# EAGLE board M896n (EAGLE 4.11)
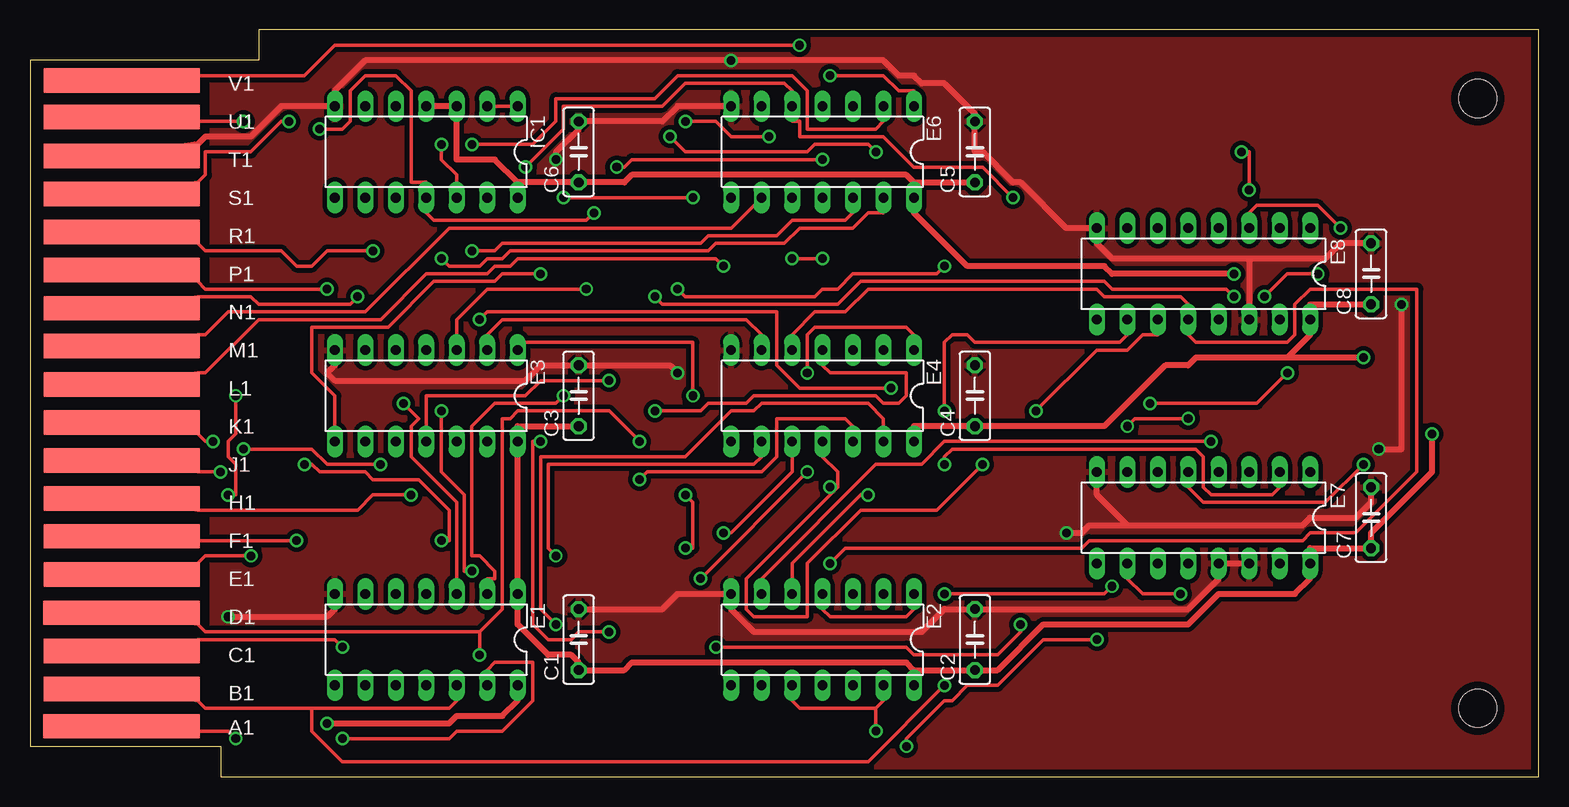
[diagram p0: board, top side]
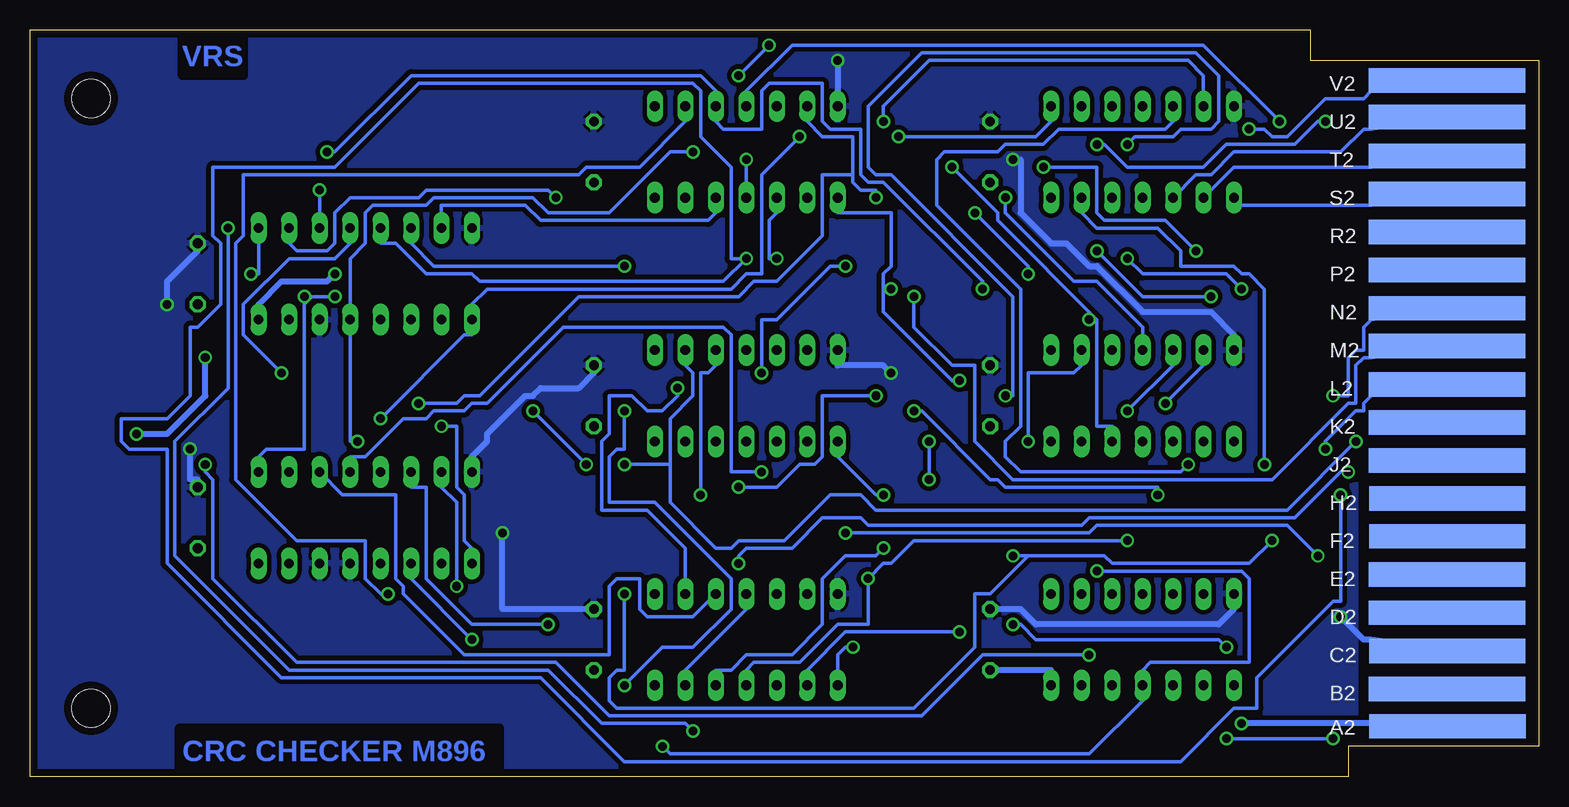
[diagram p1: board, bottom side, seen from below]

Size 125.73 x 62.23 mm. Coordinates in mm from the lower left corner, seen from the top.
Copper layers (1*16): Top 0.035mm / dielectric 1.5mm / Bottom 0.035mm
Design rules "10mils": minimum track width 12mil, minimum drill 28mil, track to track 10mil, track to pad 10mil, pad to pad 10mil, via to via 10mil, smd to smd 10mil, copper to edge 25mil, drill to drill 10mil, minimum pad ring 10mil, minimum via ring 8mil, stop-mask expansion 0mil, vias tented up to drill 0mil, thermal gap 10mil
Net classes: 1 power: width 0.508 mm
bRestrict: area 108,58.4 to 113,62.2; area 86.6,0.3 to 113.3,4.1

## Footprints (pad centres in the part's own frame; a part is rotated, then mirrored left to right if it is on the bottom)
C050-025X075 = drill 0.813 octagon: 1 -2.54,0; 2 2.54,0
DIL14 = drill 0.813 long: 1 -7.62,-3.81; 2 -5.08,-3.81; 3 -2.54,-3.81; 4 0,-3.81; 5 2.54,-3.81; 6 5.08,-3.81; 7 7.62,-3.81; 8 7.62,3.81; 9 5.08,3.81; 10 2.54,3.81; 11 0,3.81; 12 -2.54,3.81; 13 -5.08,3.81; 14 -7.62,3.81
DIL16 = drill 0.813 long: 1 -8.89,-3.81; 2 -6.35,-3.81; 3 -3.81,-3.81; 4 -1.27,-3.81; 5 1.27,-3.81; 6 3.81,-3.81; 7 6.35,-3.81; 8 8.89,-3.81; 9 8.89,3.81; 10 6.35,3.81; 11 3.81,3.81; 12 1.27,3.81; 13 -1.27,3.81; 14 -3.81,3.81; 15 -6.35,3.81; 16 -8.89,3.81
EDGE-CON2 = smd 13.017 x 2.032: A1 7.633,4.207; B1 7.639,7.327; C1 7.636,10.489; D1 7.633,13.665; E1 7.642,16.84; F1 7.642,20.041; H1 7.642,23.19; J1 7.642,26.34; K1 7.642,29.515; L1 7.642,32.69; M1 7.642,35.89; N1 7.642,39.04; P1 7.642,42.24; R1 7.642,45.39; S1 7.642,48.565; T1 7.642,51.74; U1 7.642,54.966; V1 7.642,58.026 | smd 13.017 x 2.032 bottom: A2 7.614,4.207; B2 7.642,7.328; C2 7.617,10.49; D2 7.642,13.665; E2 7.642,16.84; F2 7.617,20.041; H2 7.617,23.19; J2 7.642,26.34; K2 7.642,29.515; L2 7.642,32.69; M2 7.642,35.89; N2 7.642,39.04; P2 7.642,42.24; R2 7.642,45.39; S2 7.642,48.565; T2 7.642,51.74; U2 7.642,54.966; V2 7.642,58.026
SINGLE = hole 3.175: 120.65,56.515; 120.65,5.715

## Placement (x,y rotation side)
C1  .01uf  [C050-025X075]  45.72,11.43 90 top
C2  .01uf  [C050-025X075]  78.74,11.43 90 top
C3  .01uf  [C050-025X075]  45.72,31.75 90 top
C4  .01uf  [C050-025X075]  78.74,31.75 90 top
C5  .01uf  [C050-025X075]  78.74,52.07 90 top
C6  .01uf  [C050-025X075]  45.72,52.07 90 top
C7  .01uf  [C050-025X075]  111.76,21.59 90 top
C8  .01uf  [C050-025X075]  111.76,41.91 90 top
E1  7486N  [DIL14]  33.02,11.43 180 top
E2  7486N  [DIL14]  66.04,11.43 180 top
E3  7430N  [DIL14]  33.02,31.75 180 top
E4  7486N  [DIL14]  66.04,31.75 180 top
E6  7486N  [DIL14]  66.04,52.07 180 top
E7  74174N  [DIL16]  97.79,21.59 180 top
E8  74174N  [DIL16]  97.79,41.91 180 top
IC1  7410N  [DIL14]  33.02,52.07 180 top
U$1  [EDGE-CON2]  0,0 0 top
U$4  OUTLINE-SINGLE  [SINGLE]  0,0 0 top

## Library data of the parts
C1-C8 = rcl
E1-E4 E6-E8 IC1 = 74xx-jameco
U$1 U$4 = dec-con

## Nets
A1: E1.13 U$1.A1
B1: E1.12 E8.10 U$1.B1
C1: E4.13 U$1.C1
D1: E4.12 E7.5 U$1.D1
E1: E4.10 U$1.E1
F1: E4.9 E7.7 U$1.F1
GND [power]: C1.2 C2.2 C3.2 C4.2 C5.2 C6.2 C7.2 C8.2 E1.7 E2.7 E3.7 E4.7 E6.7 E7.8 E7.13 E7.14 E8.8 E8.14 IC1.7 U$1.C2 U$1.T1
H1: E4.4 U$1.H1
J1: E4.5 E8.12 U$1.J1
K1: E4.2 E7.2 U$1.K1
L1: E4.1 U$1.L1
L2: IC1.5 U$1.L2
M1: E6.9 U$1.M1
M2: E7.1 E8.1 U$1.M2
N1: E6.12 E8.7 U$1.N1
N2: E6.10 E8.5 U$1.N2
N$1: E2.1 E2.4 E2.10 E2.13 E3.3 E6.3 E8.3
N$2: E2.2 E3.12 E6.11
N$3: E2.5 E4.3
N$4: E2.9 E3.2 E4.6
N$5: E2.12 E4.8
N$6: E1.11 E3.5 E7.11
N$7: E3.1 E4.11 E8.11
N$8: E1.2 IC1.12
N$9: E3.11 E6.8 E8.6
N$10: E3.4 E6.6 E8.4
N$11: E1.3 E3.6
N$12: E2.6 E8.13 IC1.1 IC1.2
N$13: E2.11 E7.4 IC1.13
N$14: E2.3 E7.3
N$15: E2.8 E7.6
N$16: E7.9 E8.9 IC1.6
P1: E6.13 U$1.P1
R1: E6.5 E8.2 U$1.R1
S1: E6.4 U$1.S1
S2: IC1.8 U$1.S2
T2: IC1.9 U$1.T2
U1: E6.2 E7.10 U$1.U1
U2: IC1.10 U$1.U2
V1: E6.1 U$1.V1
V2: E3.8 IC1.11 U$1.V2
VCC [power]: C1.1 C2.1 C3.1 C4.1 C5.1 C6.1 C7.1 C8.1 E1.1 E1.14 E2.14 E3.14 E4.14 E6.14 E7.16 E8.16 IC1.3 IC1.4 IC1.14 U$1.A2

## Tracks (layer width: path | path; a pad name or v marks a point on that pad's centre or on a via)
A1  (via drill 0.71)
  Top 0.305: v17.15,3.17 16.51,3.81 13.97,3.81 U$1.A1 | v26.04,3.17 34.93,3.17 35.56,3.81 39.37,3.81 41.91,6.35 41.91,9.53 38.74,9.53 38.1,8.89 E1.13
  Bottom 0.305: v17.15,3.17 v26.04,3.17
B1  (via drill 0.71)
  Top 0.305: 23.5,5.71 34.93,5.71 35.56,6.35 E1.12 | 23.5,5.71 14.61,5.71 13.97,6.35 U$1.B1 | v76.2,30.48 76.2,36.2 76.84,36.83 78.11,36.83 78.74,36.2 90.81,36.2 91.44,36.83 E8.10 | v76.2,7.62 69.85,1.27 26.04,1.27 23.5,3.81 23.5,5.71
  Bottom 0.305: v76.2,30.48 76.2,27.3 76.84,27.3 77.47,26.67 77.47,22.86 73.66,22.86 67.31,16.51 67.31,13.97 70.49,10.79 73.03,10.79 v76.2,7.62
C1  (via drill 0.71)
  Top 0.305: v26.04,10.79 25.4,11.43 13.97,11.43 U$1.C1 | v43.82,12.7 42.55,13.97 42.55,26.67 54.61,26.67 58.42,30.48 60.33,30.48 60.96,31.11 69.85,31.11 71.12,29.84 E4.13
  Bottom 0.305: v26.04,10.79 26.67,11.43 41.91,11.43 43.18,12.7 v43.82,12.7
D1  (via drill 0.71)
  Top 0.305: 37.47,12.06 14.61,12.06 13.97,12.7 U$1.D1 | 37.47,12.06 39.37,13.97 39.37,29.84 40.01,29.84 40.64,30.48 48.26,30.48 v50.8,27.94 | v50.8,24.77 51.44,25.4 60.96,25.4 62.23,26.67 62.23,29.84 67.95,29.84 68.58,29.21 E4.12 | v111.13,26.04 107.95,22.86 97.79,22.86 96.52,24.13 E7.5 | 37.47,12.06 v37.47,10.16
  Bottom 0.305: v50.8,27.94 v50.8,24.77 | v111.13,26.04 111.13,25.4 110.49,24.77 110.49,16.51 103.51,9.53 81.92,9.53 77.47,5.08 51.44,5.08 46.36,10.16 v37.47,10.16
E1  (via drill 0.71)
  Top 0.305: v18.42,18.41 14.61,18.41 13.97,17.78 U$1.E1 | v57.79,20.32 58.42,20.32 63.5,25.4 E4.10
  Bottom 0.305: v18.42,18.41 20.96,20.95 36.83,20.95 37.47,20.32 v57.79,20.32
F1  (via drill 0.71)
  Top 0.305: v22.23,19.68 13.97,19.68 U$1.F1 | v43.82,18.41 43.18,19.05 43.18,26.04 60.33,26.04 60.96,26.67 E4.9 | v90.17,15.88 89.54,15.24 v76.2,15.24
  Bottom 0.305: v22.23,19.68 24.13,17.78 35.56,17.78 36.2,18.41 42.55,18.41 | 42.55,18.41 v43.82,18.41 | v90.17,15.88 90.17,22.86 91.44,24.13 E7.7 | v76.2,15.24 76.2,8.89 76.84,8.89 77.47,8.26 77.47,6.35 76.84,5.71 52.07,5.71 46.99,10.79 46.99,15.24 45.72,15.24 42.55,18.41
GND  (via drill 0.71)
  Top 0.508: 101.6,43.18 107.95,43.18 109.22,44.45 C8.2 | 101.6,43.18 90.17,43.18 88.9,44.45 E8.8 86.36,45.72 82.55,49.53 81.92,49.53 79.38,52.07 78.74,52.07 C5.2 78.74,55.24 76.2,57.78 74.3,57.78 73.66,58.42 72.39,58.42 71.12,59.69 v58.42,59.69 27.94,59.69 25.4,57.15 IC1.7 20.96,55.88 18.42,53.34 14.61,53.34 13.97,52.7 U$1.T1 | 101.6,43.18 E8.14 | E3.7 25.4,34.29 24.77,33.66 25.4,33.02 41.28,33.02 42.55,34.29 C3.2 53.34,34.29 v53.98,33.66 | E6.7 53.98,55.88 52.71,54.61 C6.2 45.72,53.98 43.82,52.07 v43.82,51.44 | 91.44,20.95 106.05,20.95 106.68,21.59 110.49,21.59 111.76,22.86 C7.2 | 91.44,20.95 88.9,23.5 E7.8 | v16.51,13.34 24.77,13.34 25.4,13.97 E1.7 | C1.2 52.71,13.97 53.98,15.24 E2.7 58.42,13.97 60.33,12.06 74.3,12.06 76.2,13.97 C2.2 96.52,13.97 99.06,16.51 E7.13 E7.14 | 91.44,20.95 88.27,20.95 87.63,20.32 v86.36,20.32 | v114.3,39.37 114.3,27.3 v112.4,27.3
  Bottom 0.508: v53.98,33.66 54.61,34.29 58.42,34.29 E4.7 | v58.42,59.69 E6.7 | v43.82,51.44 43.18,51.44 43.18,46.99 40.64,44.45 39.37,44.45 37.47,42.55 36.83,42.55 33.02,38.73 27.31,38.73 25.4,36.83 E3.7 | C4.2 78.74,33.66 80.01,32.38 83.19,32.38 83.82,31.75 84.46,31.75 87.63,28.57 87.63,27.94 88.9,26.67 E7.8 | v16.51,13.34 14.61,11.43 13.97,11.43 U$1.C2 | E1.7 25.4,13.97 26.67,12.7 41.91,12.7 43.18,13.97 C1.2 | v86.36,20.32 86.36,13.97 C2.2 | v114.3,39.37 114.3,41.27 111.76,43.81 C8.2 | v112.4,27.3 112.4,24.77 111.76,24.77 C7.2
  pour Top (isolate 0.381): 15.24,62.23 125.73,62.23 125.73,0 15.24,0
  pour Bottom (isolate 0.381): 15.24,62.23 125.73,62.23 125.73,0 15.24,0
H1  (via drill 0.71)
  Top 0.305: v31.75,23.5 28.58,23.5 27.31,22.23 13.97,22.23 U$1.H1 | v52.07,30.48 55.88,30.48 56.52,31.11 59.69,31.11 60.33,31.75 70.49,31.75 71.12,31.11 72.39,31.11 73.03,31.75 73.03,33.66 66.68,33.66 66.04,34.29 E4.4
  Bottom 0.305: v31.75,23.5 31.75,24.13 44.45,24.13 45.09,24.77 45.72,24.77 51.44,30.48 v52.07,30.48
J1  (via drill 0.71)
  Top 0.305: v15.88,25.4 13.97,25.4 U$1.J1 | v66.68,17.78 67.95,19.05 87.63,19.05 88.27,19.68 106.05,19.68 106.68,20.32 110.49,20.32 115.57,25.4 115.57,40.64 106.68,40.64 105.41,39.37 105.41,36.83 104.78,36.2 97.16,36.2 96.52,36.83 E8.12 96.52,39.37 95.89,40.01 89.54,40.01 88.9,40.64 69.85,40.64 67.95,38.73 65.41,38.73 63.5,36.83 E4.5
  Bottom 0.305: v15.88,25.4 16.51,25.4 20.32,21.59 37.47,21.59 38.1,20.95 55.88,20.95 56.52,21.59 59.69,21.59 62.23,19.05 66.04,19.05 66.68,18.41 v66.68,17.78
K1  (via drill 0.71)
  Top 0.305: v15.24,27.94 14.61,27.94 13.97,28.57 U$1.K1 | v76.2,26.04 76.2,26.67 76.84,27.3 97.16,27.3 97.79,26.67 97.79,24.13 98.43,23.5 103.51,23.5 104.14,24.13 E7.2
  Bottom 0.305: v15.24,27.94 20.96,22.23 55.25,22.23 56.52,23.5 59.06,23.5 62.87,19.68 66.68,19.68 67.31,19.05 68.58,19.05 72.39,22.86 72.39,26.04 | 72.39,26.04 72.39,29.84 70.49,31.75 70.49,33.66 71.12,34.29 E4.2 | 72.39,26.04 v76.2,26.04
L1  (via drill 0.71)
  Top 0.305: v64.77,33.66 64.77,36.83 65.41,37.47 73.03,37.47 73.66,36.83 E4.1 | v57.79,42.55 57.15,43.18 40.64,43.18 40.01,42.55 38.74,42.55 38.1,41.91 33.02,41.91 29.21,38.1 19.05,38.1 14.61,33.66 13.97,33.66 U$1.L1
  Bottom 0.305: v64.77,33.66 64.77,38.1 63.5,38.1 59.06,42.55 v57.79,42.55
L2  (via drill 0.71)
  Top 0.305: v17.78,27.3 23.5,27.3 24.77,26.04 v29.21,26.04
  Bottom 0.305: v17.78,27.3 17.78,27.94 15.24,30.48 14.61,30.48 14.61,31.11 13.97,31.75 U$1.L2 | v29.21,26.04 29.85,25.4 43.18,25.4 44.45,26.67 44.45,27.94 43.18,29.21 43.18,40.64 50.17,47.62 50.17,51.44 49.53,52.07 45.09,52.07 44.45,52.7 41.28,52.7 40.01,53.98 31.12,53.98 30.48,54.61 IC1.5
M1
  Top 0.305: E6.9 58.42,45.72 34.93,45.72 27.94,38.73 16.51,38.73 14.61,36.83 13.97,36.83 U$1.M1
M2  (via drill 0.71)
  Top 0.305: v52.07,40.01 52.71,39.37 67.31,39.37 69.22,41.27 89.54,41.27 90.17,40.64 99.7,40.64 v100.33,40.01 | v107.32,41.91 104.78,41.91 v102.87,40.01
  Bottom 0.305: v52.07,40.01 52.07,37.47 48.9,34.29 46.99,34.29 46.99,27.94 43.82,24.77 22.23,24.77 15.88,31.11 15.24,31.11 15.24,34.29 14.61,34.92 13.97,34.92 U$1.M2 | v100.33,40.01 102.24,40.01 | 102.24,40.01 102.87,39.37 102.87,27.3 106.05,27.3 106.68,26.67 E7.1 | v107.32,41.91 106.68,41.91 E8.1 | 102.24,40.01 v102.87,40.01
N1  (via drill 0.71)
  Top 0.305: v27.31,40.01 26.67,39.37 19.05,39.37 18.42,40.01 13.97,40.01 U$1.N1 | v36.83,43.81 38.74,43.81 39.37,44.45 55.88,44.45 56.52,45.09 62.23,45.09 63.5,46.35 67.95,46.35 68.58,46.99 E6.12
  Bottom 0.305: v27.31,40.01 33.02,40.01 v36.83,43.81 | E8.7 91.44,47.62 84.46,47.62 83.19,46.35 69.22,46.35 68.58,46.99 E6.12
N2  (via drill 0.71)
  Top 0.305: v66.04,43.18 v63.5,43.18 | v17.15,31.75 17.15,28.57 16.51,27.94 16.51,26.67 17.15,26.04 17.15,23.5 v16.51,23.5
  Bottom 0.305: v63.5,43.18 64.14,43.18 64.14,46.35 63.5,46.99 E6.10 | E8.5 96.52,44.45 95.25,44.45 92.71,41.91 88.9,41.91 88.27,41.27 67.95,41.27 v66.04,43.18 67.31,43.18 67.31,50.8 69.85,53.34 69.85,57.15 70.49,57.78 93.35,57.78 100.33,50.8 110.49,50.8 110.49,45.09 109.86,44.45 109.86,39.37 111.76,37.47 112.4,37.47 112.4,31.75 114.3,29.84 118.11,29.84 118.11,27.94 117.48,27.3 114.3,27.3 114.3,17.78 104.78,8.26 83.19,8.26 76.2,1.27 29.85,1.27 25.4,5.71 23.5,5.71 23.5,8.26 17.15,14.61 16.51,14.61 v16.51,23.5 | v17.15,31.75 15.88,31.75 15.88,34.92 15.24,35.56 14.61,35.56 14.61,37.47 13.97,38.1 U$1.N2
N$1  (via drill 0.71)
  Top 0.305: 70.49,5.71 64.14,5.71 63.5,6.35 E2.10 | 70.49,5.71 71.12,6.35 E2.13 | E2.4 66.04,13.97 66.68,13.34 73.03,13.34 73.66,13.97 E2.1 | v101.6,48.9 101.6,52.07 v100.97,52.07 | v46.36,40.64 38.1,40.64 35.56,38.1 E3.3 | 70.49,5.71 v70.49,3.81 | v109.22,45.72 107.32,47.62 102.24,47.62 101.6,46.99 E8.3
  Bottom 0.305: E2.13 71.12,8.89 66.04,13.97 E2.4 | v100.97,52.07 100.33,52.07 93.98,58.42 69.85,58.42 68.58,57.15 E6.3 68.58,54.61 67.95,53.98 64.77,53.98 64.77,57.15 64.14,57.78 59.69,57.78 59.69,54.61 59.06,53.98 56.52,53.98 56.52,50.16 55.88,49.53 54.61,49.53 46.36,41.27 v46.36,40.64 | E8.3 v101.6,48.9 | v70.49,3.81 71.12,4.45 78.11,4.45 82.55,8.89 104.14,8.89 113.67,18.41 113.67,27.94 109.22,32.38 v109.22,45.72
N$2  (via drill 0.71)
  Top 0.305: v66.04,51.44 50.17,51.44 49.53,50.8 v48.9,50.8 | v71.76,32.38 64.14,32.38 62.23,34.29 62.23,38.73 38.1,38.73 v37.47,38.1
  Bottom 0.305: v48.9,50.8 45.09,46.99 45.09,46.35 36.83,38.1 | 36.83,38.1 36.83,29.21 35.56,29.21 E3.12 | v66.04,51.44 E6.11 | v71.76,32.38 71.76,31.75 73.03,30.48 74.3,30.48 75.57,31.75 77.47,31.75 77.47,28.57 78.11,27.94 78.11,22.23 74.3,22.23 71.12,19.05 E2.2 | 36.83,38.1 v37.47,38.1
N$3  (via drill 0.71)
  Top 0.305: v69.85,23.5 69.22,23.5 63.5,17.78 E2.5
  Bottom 0.305: v69.85,23.5 69.85,33.66 69.22,33.66 68.58,34.29 E4.3
N$4  (via drill 0.71)
  Top 0.305: E4.6 60.96,36.83 59.69,38.1 39.37,38.1 38.1,36.83 E3.2 | v48.26,12.06 45.72,12.06 45.09,11.43 43.18,11.43 41.91,12.7 41.91,27.94 v42.55,27.94
  Bottom 0.305: v48.26,12.06 57.79,12.06 60.96,8.89 E2.9 | v42.55,27.94 42.55,33.66 38.74,33.66 38.1,34.29 E3.2
N$5  (via drill 0.71)
  Top 0.305: v54.61,23.5 55.25,22.86 55.25,19.05 v54.61,19.05
  Bottom 0.305: v54.61,23.5 55.25,23.5 58.42,26.67 E4.8 | v54.61,19.05 55.25,18.41 57.79,18.41 59.69,16.51 59.69,12.7 62.23,10.16 66.04,10.16 67.31,8.89 68.58,8.89 E2.12
N$6  (via drill 0.71)
  Top 0.305: v73.03,2.54 73.03,3.17 76.2,6.35 76.84,6.35 78.11,7.62 80.65,7.62 84.46,11.43 v88.9,11.43 | v34.29,30.48 34.29,25.4 36.2,23.5 36.2,17.14 v36.83,17.14
  Bottom 0.305: v73.03,2.54 72.39,1.91 37.47,1.91 33.02,6.35 E1.11 33.02,8.89 32.39,9.53 24.13,9.53 24.13,16.51 24.77,17.14 v36.83,17.14 | v88.9,11.43 93.98,16.51 E7.11 | v34.29,30.48 30.48,34.29 E3.5
N$7  (via drill 0.71)
  Top 0.305: 67.31,24.13 67.31,25.4 66.04,26.67 E4.11 | 67.31,24.13 v66.68,24.13 | v55.25,31.75 55.25,36.2 41.28,36.2 E3.1 | v83.82,30.48 88.9,35.56 91.44,35.56 92.71,36.83 93.98,36.83 E8.11 | v79.38,26.04 75.57,22.23 69.22,22.23 64.77,17.78 64.77,13.34 60.33,13.34 59.69,13.97 59.69,16.51 67.31,24.13
  Bottom 0.305: v66.68,24.13 63.5,24.13 61.6,26.04 60.33,26.04 59.69,26.67 59.69,31.75 v55.25,31.75 | v79.38,26.04 v83.82,30.48
N$8  (via drill 0.71)
  Top 0.305: v34.29,52.7 34.29,51.44 35.56,50.16 IC1.12 | v44.45,31.75 43.82,31.11 38.74,31.11 36.83,29.21 36.83,18.41 37.47,18.41 38.74,17.14 38.74,16.51 38.1,16.51 E1.2
  Bottom 0.305: v34.29,52.7 33.66,53.34 30.48,53.34 29.85,53.98 27.31,53.98 26.67,54.61 26.67,58.42 28.58,60.33 51.44,60.33 55.88,55.88 55.88,50.8 55.25,50.16 53.98,50.16 43.82,40.01 43.82,31.75 v44.45,31.75
N$9  (via drill 0.71)
  Top 0.305: v48.26,33.02 42.55,33.02 41.28,31.75 33.02,31.75 E3.11 | v76.2,42.55 75.57,41.91 68.58,41.91 67.31,40.64 66.04,40.64 65.41,40.01 54.61,40.01 v53.98,40.64
  Bottom 0.305: v48.26,33.02 48.9,33.02 54.61,38.73 54.61,40.64 | 54.61,40.64 54.61,41.91 53.98,42.55 53.98,46.99 58.42,46.99 E6.8 | v76.2,42.55 92.08,42.55 93.98,44.45 E8.6 | 54.61,40.64 v53.98,40.64
N$10  (via drill 0.71)
  Top 0.305: v44.45,48.26 v55.25,48.26 | v104.78,33.66 102.24,31.11 v93.35,31.11
  Bottom 0.305: v44.45,48.26 44.45,46.99 38.74,41.27 36.83,41.27 33.02,37.47 E3.4 | v55.25,48.26 55.25,48.9 56.52,48.9 57.15,49.53 57.15,50.16 | 57.15,50.16 57.15,53.34 59.69,53.34 60.96,54.61 E6.6 | v104.78,33.66 107.95,36.83 107.95,39.37 104.14,43.18 100.33,43.18 99.06,44.45 E8.4 | v93.35,31.11 90.17,31.11 89.54,31.75 88.27,31.75 80.01,40.01 66.68,40.01 65.41,41.27 63.5,41.27 59.69,45.09 59.69,50.16 57.15,50.16
N$11  (via drill 0.71)
  Top 0.305: v31.12,31.11 32.39,29.84 31.75,29.21 31.75,26.67 35.56,22.86 E1.3
  Bottom 0.305: v31.12,31.11 27.94,34.29 E3.6
N$12  (via drill 0.71)
  Top 0.305: IC1.1 IC1.2 | v98.43,27.94 76.2,27.94 74.3,26.04 70.49,26.04 60.96,16.51 E2.6 | v53.34,53.34 54.61,52.07 64.77,52.07 65.41,52.7 69.85,52.7 v70.49,52.07
  Bottom 0.305: v98.43,27.94 99.06,27.94 E8.13 99.06,43.18 97.79,44.45 97.79,46.99 97.16,47.62 92.71,47.62 92.08,48.26 83.82,48.26 82.55,46.99 77.47,46.99 72.39,52.07 v70.49,52.07 | v53.34,53.34 41.91,53.34 40.64,54.61 IC1.1
N$13  (via drill 0.71)
  Top 0.305: v55.88,16.51 v64.77,25.4 | v22.86,26.04 23.5,26.04 24.13,25.4 27.94,25.4 28.58,24.77 32.39,24.77 34.93,22.23 34.93,19.68 v34.29,19.68
  Bottom 0.305: v64.77,25.4 67.31,25.4 67.31,36.83 67.95,37.47 81.28,37.47 87.63,31.11 88.9,31.11 89.54,30.48 92.08,30.48 92.71,29.84 94.62,29.84 97.79,26.67 99.06,26.67 E7.4 | E2.11 66.04,8.89 65.41,9.53 61.6,9.53 58.42,12.7 55.88,12.7 v55.88,16.51 54.61,17.78 53.98,17.78 52.07,19.68 v34.29,19.68 | v22.86,26.04 22.86,40.64 24.13,41.91 24.77,41.91 25.4,42.55 29.85,42.55 29.85,43.81 31.75,45.72 36.83,45.72 38.1,46.99 IC1.13
N$14
  Bottom 0.305: E2.3 70.49,13.34 74.3,13.34 74.93,13.97 74.93,16.51 76.84,16.51 77.47,15.88 77.47,10.16 89.54,10.16 94.62,15.24 94.62,15.88 95.25,16.51 95.25,23.5 99.7,23.5 E7.3
N$15  (via drill 0.71)
  Top 0.305: v57.15,10.79 73.03,10.79 73.66,10.16 80.65,10.16 82.55,12.06 v82.55,12.7
  Bottom 0.305: v57.15,10.79 57.79,10.79 58.42,10.16 E2.8 | v82.55,12.7 88.9,12.7 92.71,16.51 92.71,24.13 93.98,24.13 E7.6
N$16  (via drill 0.71)
  Top 0.305: v91.44,29.21 92.08,29.84 v96.52,29.84 | v54.61,54.61 57.15,54.61 58.42,53.34 v61.6,53.34
  Bottom 0.305: v91.44,29.21 90.17,29.21 90.17,24.13 89.54,23.5 89.54,19.68 88.9,19.05 E7.9 | v96.52,29.84 89.54,36.83 88.9,36.83 E8.9 88.9,39.37 87.63,40.64 67.31,40.64 66.04,41.91 64.77,41.91 64.77,50.16 v61.6,53.34 | v54.61,54.61 54.61,55.88 50.8,59.69 29.21,59.69 27.94,58.42 IC1.6
P1  (via drill 0.71)
  Top 0.305: v24.77,40.64 14.61,40.64 13.97,41.27 U$1.P1 | v34.29,43.18 34.93,42.55 37.47,42.55 38.1,43.18 39.37,43.18 40.01,43.81 56.52,43.81 57.15,44.45 62.87,44.45 64.14,45.72 68.58,45.72 69.85,46.99 71.12,46.99 E6.13
  Bottom 0.305: v24.77,40.64 26.04,41.91 33.02,41.91 v34.29,43.18
R1  (via drill 0.71)
  Top 0.305: v28.58,43.81 24.77,43.81 23.5,42.55 22.23,42.55 20.96,43.81 14.61,43.81 13.97,44.45 U$1.R1 | v41.28,50.8 44.45,53.98 44.45,55.88 52.71,55.88 54.61,57.78 62.87,57.78 63.5,57.15 E6.5 63.5,54.61 64.14,54.61 64.14,53.34 71.12,53.34 73.66,50.8 79.38,50.8 v81.92,48.26
  Bottom 0.305: v28.58,43.81 31.12,46.35 36.2,46.35 36.83,46.99 36.83,50.8 v41.28,50.8 | v81.92,48.26 82.55,48.9 92.71,48.9 93.35,48.26 99.06,48.26 100.33,46.99 100.33,44.45 100.97,43.81 103.51,43.81 104.14,44.45 E8.2
S1  (via drill 0.71)
  Top 0.305: v21.59,54.61 20.96,54.61 18.42,52.07 14.61,52.07 14.61,50.16 13.97,49.53 U$1.S1
  Bottom 0.305: v21.59,54.61 27.94,60.96 62.23,60.96 66.04,57.15 E6.4
S2
  Bottom 0.305: IC1.8 24.77,47.62 13.97,47.62 U$1.S2
T2
  Bottom 0.305: IC1.9 25.4,50.8 13.97,50.8 U$1.T2
U1  (via drill 0.71)
  Top 0.305: v17.78,54.61 13.97,54.61 U$1.U1 | v36.83,52.7 41.91,52.7 43.82,54.61 43.82,56.52 52.07,56.52 53.98,58.42 63.5,58.42 64.77,57.15 64.77,53.98 70.49,53.98 71.12,54.61 E6.2 | v95.89,15.24 92.71,15.24 91.44,16.51 E7.10
  Bottom 0.305: v17.78,54.61 18.42,54.61 20.32,52.7 26.04,52.7 27.94,50.8 34.29,50.8 36.2,52.7 v36.83,52.7 | v95.89,15.24 96.52,15.24 97.79,16.51 97.79,19.68 103.51,19.68 108.59,24.77 108.59,44.45 107.95,45.09 107.95,50.16 80.01,50.16 79.38,50.8 74.93,50.8 71.12,54.61 E6.2
U2
  Bottom 0.305: IC1.10 28.58,50.16 27.31,50.16 25.4,52.07 16.51,52.07 14.61,53.98 13.97,53.98 U$1.U2
V1  (via drill 0.71)
  Top 0.305: v66.68,58.42 71.12,58.42 72.39,57.15 73.66,57.15 E6.1 | v64.14,60.96 25.4,60.96 22.86,58.42 13.97,58.42 U$1.V1
  Bottom 0.305: v64.14,60.96 v66.68,58.42
V2  (via drill 0.71)
  Top 0.305: v24.13,53.98 26.04,53.98 26.67,54.61 26.67,57.15 27.94,58.42 30.48,58.42 31.75,57.15 31.75,49.53 33.02,49.53 IC1.11 33.02,46.99 33.66,46.35 46.36,46.35 v46.99,46.99 | v42.55,41.91 39.37,41.91 38.74,41.27 33.66,41.27 29.85,37.47 23.5,37.47 23.5,33.66 25.4,31.75 E3.8
  Bottom 0.305: v24.13,53.98 22.86,53.98 22.23,53.34 20.96,53.34 17.78,56.52 14.61,56.52 13.97,57.15 U$1.V2 | v42.55,41.91 42.55,42.55 v46.99,46.99
VCC  (via drill 0.71)
  Top 0.508: E4.14 73.66,29.21 C4.1 89.54,29.21 94.62,34.29 96.52,34.29 97.16,34.92 104.78,34.92 | C8.1 106.68,39.37 E8.16 106.68,36.83 104.78,34.92 | 73.66,49.53 C5.1 | IC1.4 IC1.3 35.56,51.44 38.74,51.44 40.64,49.53 | 40.64,49.53 C6.1 49.53,49.53 50.17,50.16 73.03,50.16 73.66,49.53 | 40.64,49.53 IC1.14 | 73.66,49.53 E6.14 73.66,46.99 78.11,42.55 89.54,42.55 90.17,41.91 v100.33,41.91 | C3.1 40.64,29.21 E3.14 E1.1 40.64,12.7 43.18,10.16 45.09,10.16 45.72,9.53 C1.1 49.53,8.89 50.17,9.53 73.03,9.53 73.66,8.89 | 73.66,8.89 C2.1 80.65,8.89 84.46,12.7 96.52,12.7 99.06,15.24 105.41,15.24 106.68,16.51 E7.16 106.68,19.05 C7.1 111.76,20.32 116.84,25.4 v116.84,28.57 | v24.77,4.45 34.93,4.45 35.56,5.08 39.37,5.08 40.64,6.35 E1.14 | 73.66,8.89 E2.14 | v111.13,34.92 104.78,34.92
  Bottom 0.508: v100.33,41.91 100.97,41.27 104.78,41.27 106.68,39.37 E8.16 | v24.77,4.45 13.97,4.45 U$1.A2 | C1.1 40.64,8.89 E1.14 | v111.13,34.92 111.13,31.75 114.3,28.57 v116.84,28.57

## Text on the board
Bottom: VRS | CRC CHECKER M896